# EAGLE board pimc_pb (EAGLE 5.07)
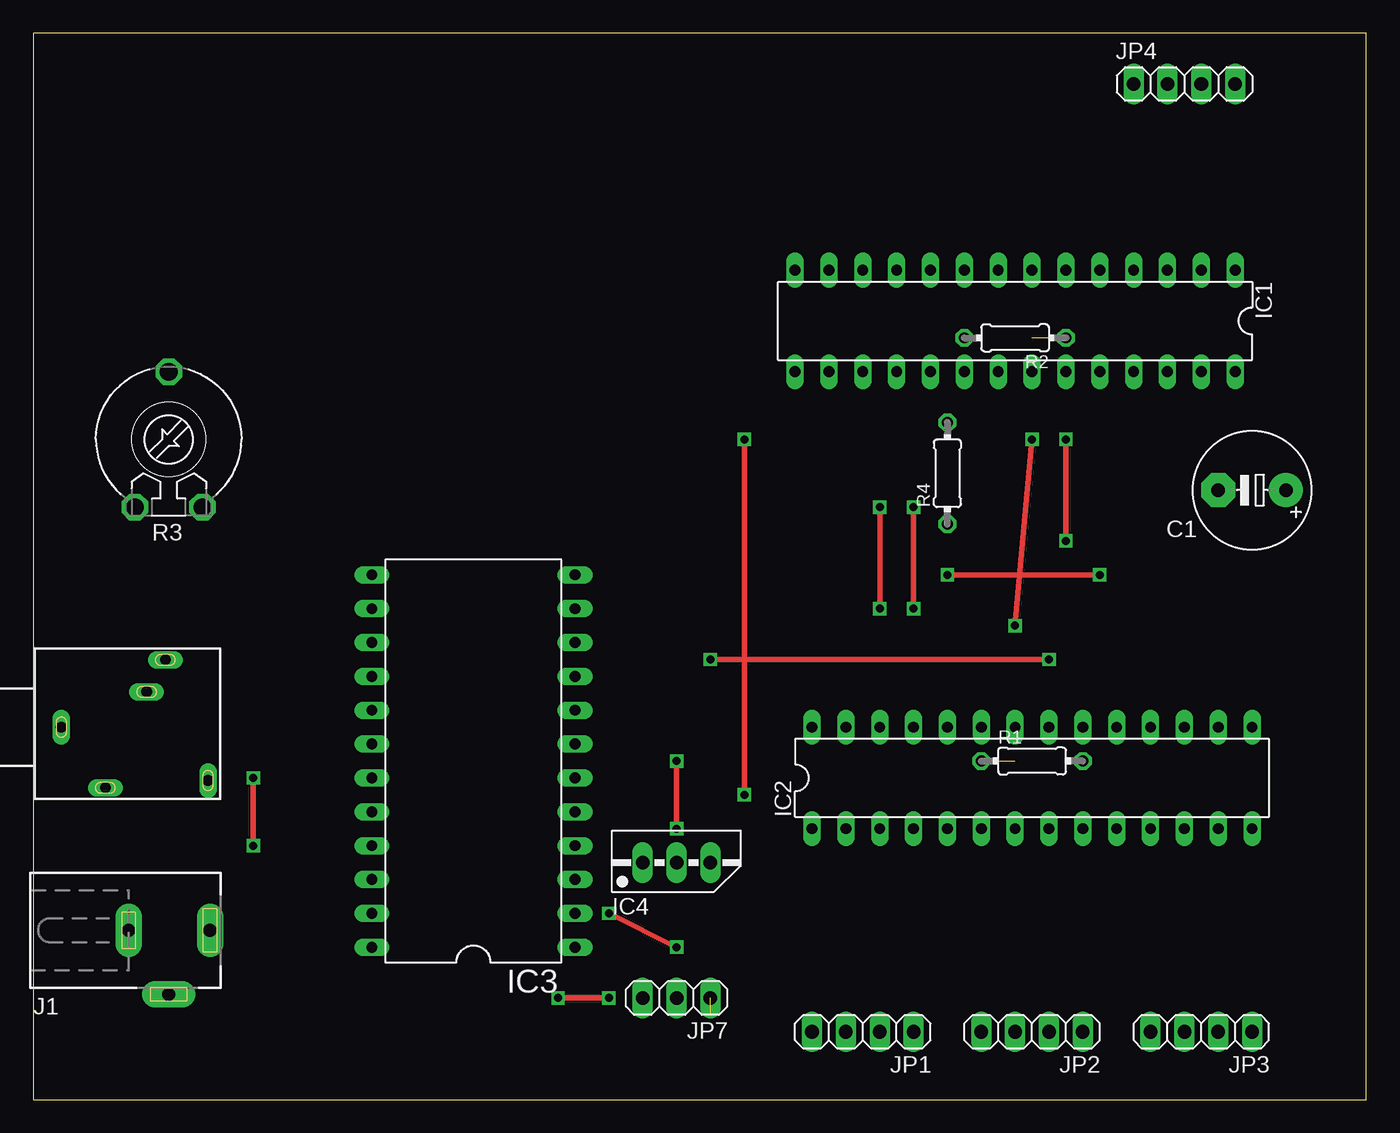
[diagram p0: board, top side]
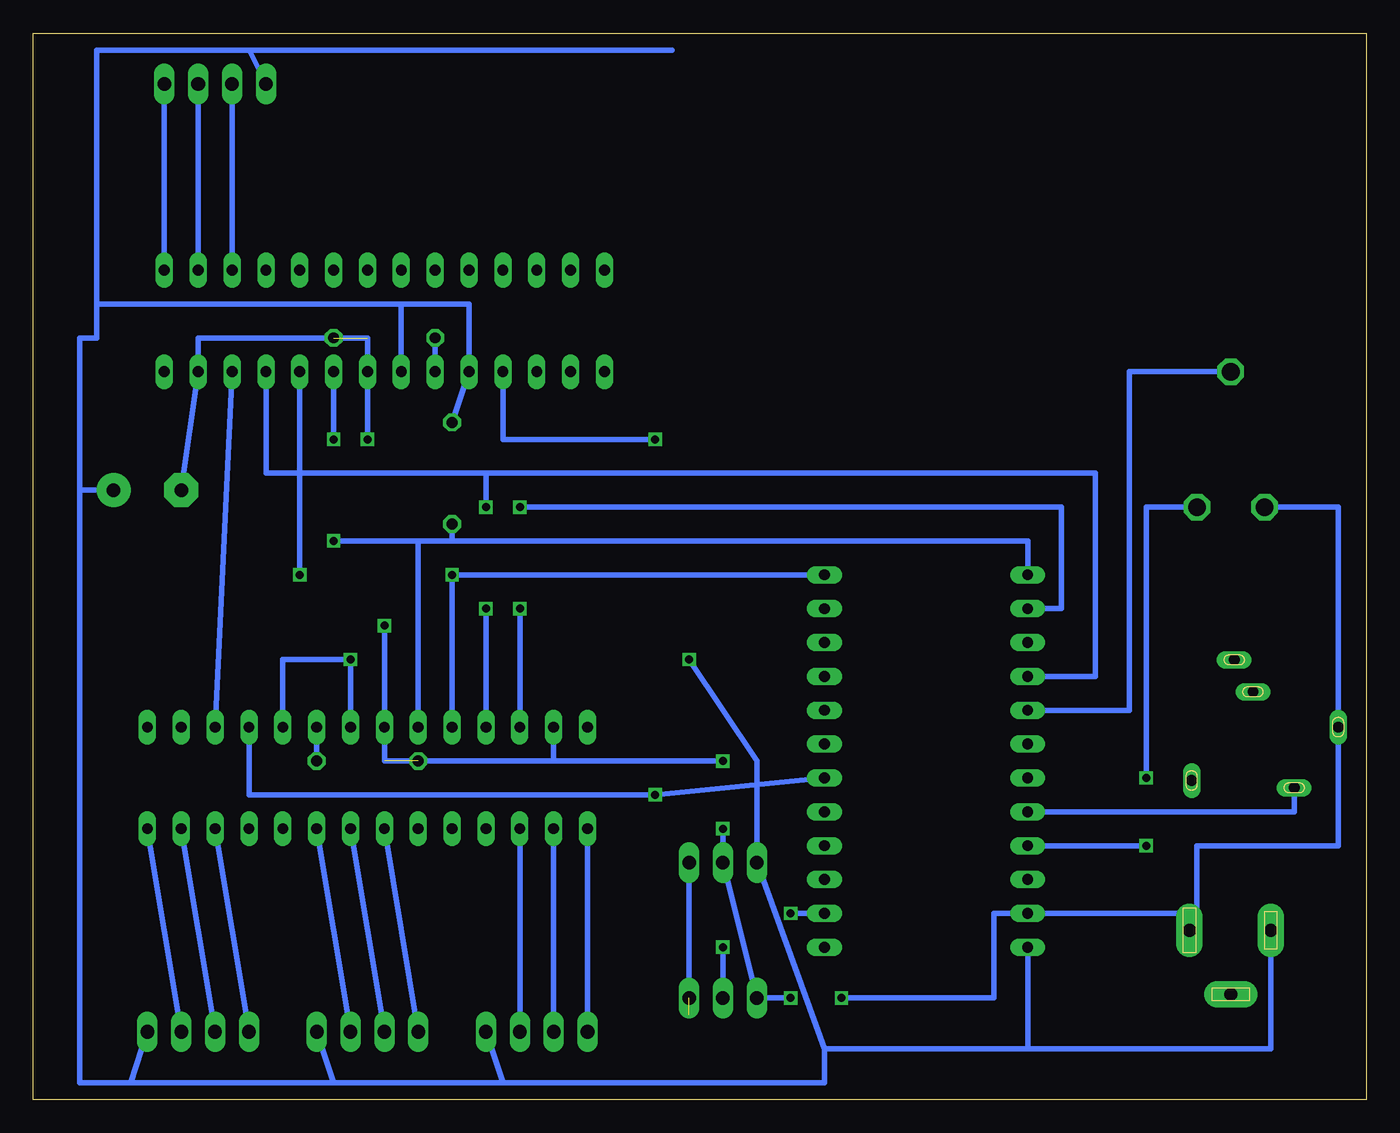
[diagram p1: board, bottom side, seen from below]

Size 100 x 80 mm. Coordinates in mm from the lower left corner, seen from the top.
Outline: 0,0 100,0 100,80 0,80 0,0
Copper layers (1*16): Top 0.035mm / dielectric 1.5mm / Bottom 0.035mm
Design rules "default": minimum track width 10mil, minimum drill 24mil, track to track 8mil, track to pad 8mil, pad to pad 8mil, via to via 8mil, smd to smd 8mil, copper to edge 40mil, drill to drill 8mil, minimum pad ring 10mil, minimum via ring 8mil, stop-mask expansion 4mil, vias tented up to drill 0mil, thermal gap 10mil

## Footprints (pad centres in the part's own frame; a part is rotated, then mirrored left to right if it is on the bottom)
E5-8,5 = drill 1.016 pad 2.54 round: + -2.54,0 | drill 1.016 pad 2.54 octagon: - 2.54,0
DIL28-3 = drill 0.813 long: 1 -16.51,-3.81; 2 -13.97,-3.81; 3 -11.43,-3.81; 4 -8.89,-3.81; 5 -6.35,-3.81; 6 -3.81,-3.81; 7 -1.27,-3.81; 8 1.27,-3.81; 9 3.81,-3.81; 10 6.35,-3.81; 11 8.89,-3.81; 12 11.43,-3.81; 13 13.97,-3.81; 14 16.51,-3.81; 15 16.51,3.81; 16 13.97,3.81; 17 11.43,3.81; 18 8.89,3.81; 19 6.35,3.81; 20 3.81,3.81; 21 1.27,3.81; 22 -1.27,3.81; 23 -3.81,3.81; 24 -6.35,3.81; 25 -8.89,3.81; 26 -11.43,3.81; 27 -13.97,3.81; 28 -16.51,3.81
DIL24-6 = drill 0.813 long: 1 -13.97,-7.62; 2 -11.43,-7.62; 3 -8.89,-7.62; 4 -6.35,-7.62; 5 -3.81,-7.62; 6 -1.27,-7.62; 7 1.27,-7.62; 8 3.81,-7.62; 9 6.35,-7.62; 10 8.89,-7.62; 11 11.43,-7.62; 12 13.97,-7.62; 13 13.97,7.62; 14 11.43,7.62; 15 8.89,7.62; 16 6.35,7.62; 17 3.81,7.62; 18 1.27,7.62; 19 -1.27,7.62; 20 -3.81,7.62; 21 -6.35,7.62; 22 -8.89,7.62; 23 -11.43,7.62; 24 -13.97,7.62
78MXXS = drill 1.016 long: GND 0,-2.54; IN -2.54,-2.54; OUT 2.54,-2.54
DCJ0303 = drill 1 pad 2 long: 1 0,3.1; 2 4.8,0; 3 0,-3
1X04 = drill 1.016 long: 1 -3.81,0; 2 -1.27,0; 3 1.27,0; 4 3.81,0
1X03 = drill 1.016 long: 1 -2.54,0; 2 0,0; 3 2.54,0
0204/7 = drill 0.813 octagon: 1 -3.81,0; 2 3.81,0
LI10 = drill 1.321 octagon: A -2.54,-5.08; E 2.54,-5.08; S 0,5.08
1503_09 = drill 0.8 pad 1.2 long: 1 0,-2.1; 2 -4.55,-5.4; 3 5.05,-9.9; 4 -4,-13.1; 5 2.65,-8.5

## Placement (x,y rotation side)
C1  [E5-8,5]  91.44,45.72 180 top
IC1  [DIL28-3]  73.66,58.42 180 top
IC2  [DIL28-3]  74.93,24.13 0 top
IC3  [DIL24-6]  33.02,25.4 90 top
IC4  [78MXXS]  48.26,20.32 0 top
J1  [DCJ0303]  10.16,12.7 270 top
JP1  [1X04]  62.23,5.08 180 top
JP2  [1X04]  74.93,5.08 180 top
JP3  [1X04]  87.63,5.08 180 top
JP4  [1X04]  86.36,76.2 0 top
JP7  [1X03]  48.26,7.62 180 top
R1  510  [0204/7]  74.93,25.4 0 top
R2  510  [0204/7]  73.66,57.15 180 top
R3  [LI10]  10.16,49.53 0 top
R4  [0204/7]  68.58,46.99 90 top
X1  1503_09  [1503_09]  0,27.94 90 top

## Library data of the parts
C1 R1 R2 R4 = rcl
IC1-IC3 = ic-package
IC4 = v-reg
J1 = con-jack
JP1-JP4 JP7 = pinhead
R3 = pot
X1 = con-lumberg

## Nets
+5V: IC3.21 R3.E
GND: C1.- IC1.22 IC1.27 IC2.22 IC2.27 IC3.23 IC4.GND J1.1 JP7.3 R1.1 R2.1 R3.A X1.1
N$1: IC1.25 IC2.25 IC3.16
N$2: IC1.24 IC2.24 IC3.12
N$3: IC1.23 IC2.23 IC3.13 R4.1
N$4: IC1.26 IC2.17
N$5: IC2.26 IC3.14
N$6: IC1.18 IC2.18 IC3.6
N$7: IC2.20 R1.2
N$8: IC1.20 R2.2
N$9: IC2.1 JP1.4
N$10: IC2.2 JP1.3
N$11: IC2.3 JP1.2
N$12: IC2.7 JP2.4
N$13: IC2.8 JP2.3
N$14: IC2.9 JP2.2
N$15: IC2.12 JP3.4
N$16: IC2.13 JP3.3
N$17: IC2.14 JP3.2
N$18: IC1.1 JP4.4
N$19: IC1.2 JP4.3
N$20: IC1.3 JP4.2
N$21: IC1.7
N$22: IC1.8
N$23: IC1.9
N$24: IC1.14
N$25: IC1.13
N$26: IC1.12
N$29: IC3.2 JP7.2
N$30: IC4.OUT JP7.1
N$31: IC3.20 X1.2
N$34: IC3.17 R3.S
VCC: C1.+ IC1.19 IC1.21 IC2.19 IC2.21 IC3.24 IC4.IN J1.3 JP1.1 JP2.1 JP3.1 JP4.1 R4.2

## Tracks (layer width: path | path; a pad name or v marks a point on that pad's centre or on a via)
+5V  (via drill 0.6)
  Top 0.406: v16.51,19.05 v16.51,24.13
  Bottom 0.406: R3.E 16.51,44.45 v16.51,24.13 | v16.51,19.05 IC3.21
GND  (via drill 0.6)  (2 unrouted)
  Top 0.406: v48.26,20.32 v48.26,25.4 | v39.37,7.62 v43.18,7.62 | v73.66,35.56 v74.93,49.53
  Bottom 0.406: R3.A 2.1,44.45 X1.1 2.1,19.05 12.7,19.05 12.7,12.7 J1.1 13.26,13.97 IC3.23 27.94,13.97 27.94,7.62 v39.37,7.62 | 60.96,25.4 73.66,25.4 IC2.22 v73.66,35.56 | 60.96,25.4 IC2.27 | v48.26,20.32 IC4.GND JP7.3 v43.18,7.62 | v48.26,25.4 60.96,25.4 | v74.93,49.53 IC1.22 74.93,57.15 87.63,57.15 IC1.27 C1.-
N$1  (via drill 0.6)
  Top 0.406: v66.04,44.45 v66.04,36.83
  Bottom 0.406: IC3.16 20.32,31.75 20.32,46.99 66.04,46.99 | 66.04,46.99 82.55,46.99 IC1.25 | v66.04,36.83 IC2.25 | 66.04,46.99 v66.04,44.45
N$2  (via drill 0.6)
  Top 0.406: v68.58,39.37 v80.01,39.37
  Bottom 0.406: IC3.12 v68.58,39.37 IC2.24 | v80.01,39.37 IC1.24
N$3  (via drill 0.6)
  Top 0.406: v77.47,41.91 v77.47,49.53
  Bottom 0.406: IC3.13 25.4,41.91 68.58,41.91 | 68.58,41.91 71.12,41.91 | 71.12,41.91 IC2.23 | 71.12,41.91 v77.47,41.91 | v77.47,49.53 IC1.23 | 68.58,41.91 R4.1
N$4
  Bottom 0.406: IC2.17 IC1.26
N$5  (via drill 0.6)
  Top 0.406: v63.5,44.45 v63.5,36.83
  Bottom 0.406: IC3.14 22.86,36.83 22.86,44.45 v63.5,44.45 | v63.5,36.83 IC2.26
N$6  (via drill 0.6)
  Top 0.406: v53.34,22.86 v53.34,49.53
  Bottom 0.406: IC3.6 v53.34,22.86 83.82,22.86 IC2.18 | IC1.18 64.77,49.53 v53.34,49.53
N$7
  Bottom 0.406: R1.2 IC2.20
N$8
  Bottom 0.406: IC1.20 R2.2
N$9
  Bottom 0.406: JP1.4 IC2.1
N$10
  Bottom 0.406: JP1.3 IC2.2
N$11
  Bottom 0.406: JP1.2 IC2.3
N$12
  Bottom 0.406: JP2.4 IC2.7
N$13
  Bottom 0.406: JP2.3 IC2.8
N$14
  Bottom 0.406: JP2.2 IC2.9
N$15
  Bottom 0.406: JP3.4 IC2.12
N$16
  Bottom 0.406: JP3.3 IC2.13
N$17
  Bottom 0.406: JP3.2 IC2.14
N$18
  Bottom 0.406: IC1.1 JP4.4
N$19
  Bottom 0.406: IC1.2 JP4.3
N$20
  Bottom 0.406: IC1.3 JP4.2
N$29  (via drill 0.6)
  Top 0.406: v43.18,13.97 v48.26,11.43
  Bottom 0.406: v48.26,11.43 JP7.2 | IC3.2 v43.18,13.97
N$30  (1 unrouted)
  Bottom 0.406: 50.8,6.35 IC4.OUT
N$31
  Bottom 0.406: X1.2 5.4,21.59 IC3.20
N$34
  Bottom 0.406: R3.S 17.78,54.61 17.78,29.21 IC3.17
VCC  (via drill 0.6)
  Top 0.406: v50.8,33.02 v76.2,33.02
  Bottom 0.406: 64.77,1.27 JP1.1 | 64.77,1.27 77.47,1.27 | 77.47,1.27 JP2.1 | 77.47,1.27 92.71,1.27 | 92.71,1.27 JP3.1 | 52.07,78.74 67.31,78.74 83.82,78.74 | 83.82,78.74 JP4.1 | J1.3 7.16,3.81 25.4,3.81 | 25.4,3.81 IC3.24 | 72.39,59.69 67.31,59.69 IC1.19 R4.2 | 95.25,59.69 95.25,78.74 83.82,78.74 | 92.71,1.27 96.52,1.27 96.52,45.72 | IC2.19 81.28,33.02 v76.2,33.02 IC2.21 | v50.8,33.02 45.72,25.4 IC4.IN 40.64,3.81 | 25.4,3.81 40.64,3.81 | 72.39,59.69 IC1.21 | 95.25,59.69 72.39,59.69 | 96.52,45.72 96.52,57.15 95.25,57.15 95.25,59.69 | 64.77,1.27 40.64,1.27 40.64,3.81 | 96.52,45.72 C1.+